# Altium PCB PCB1.PcbDoc
Units mm, origin at the board's own origin, x right, y up, seen from the top; angles counter-clockwise.
Board outline 51.41 x 51 mm, 2 copper layers (Top Layer, Bottom Layer); 51 components, 46 nets, 171 pads, 88 vias.
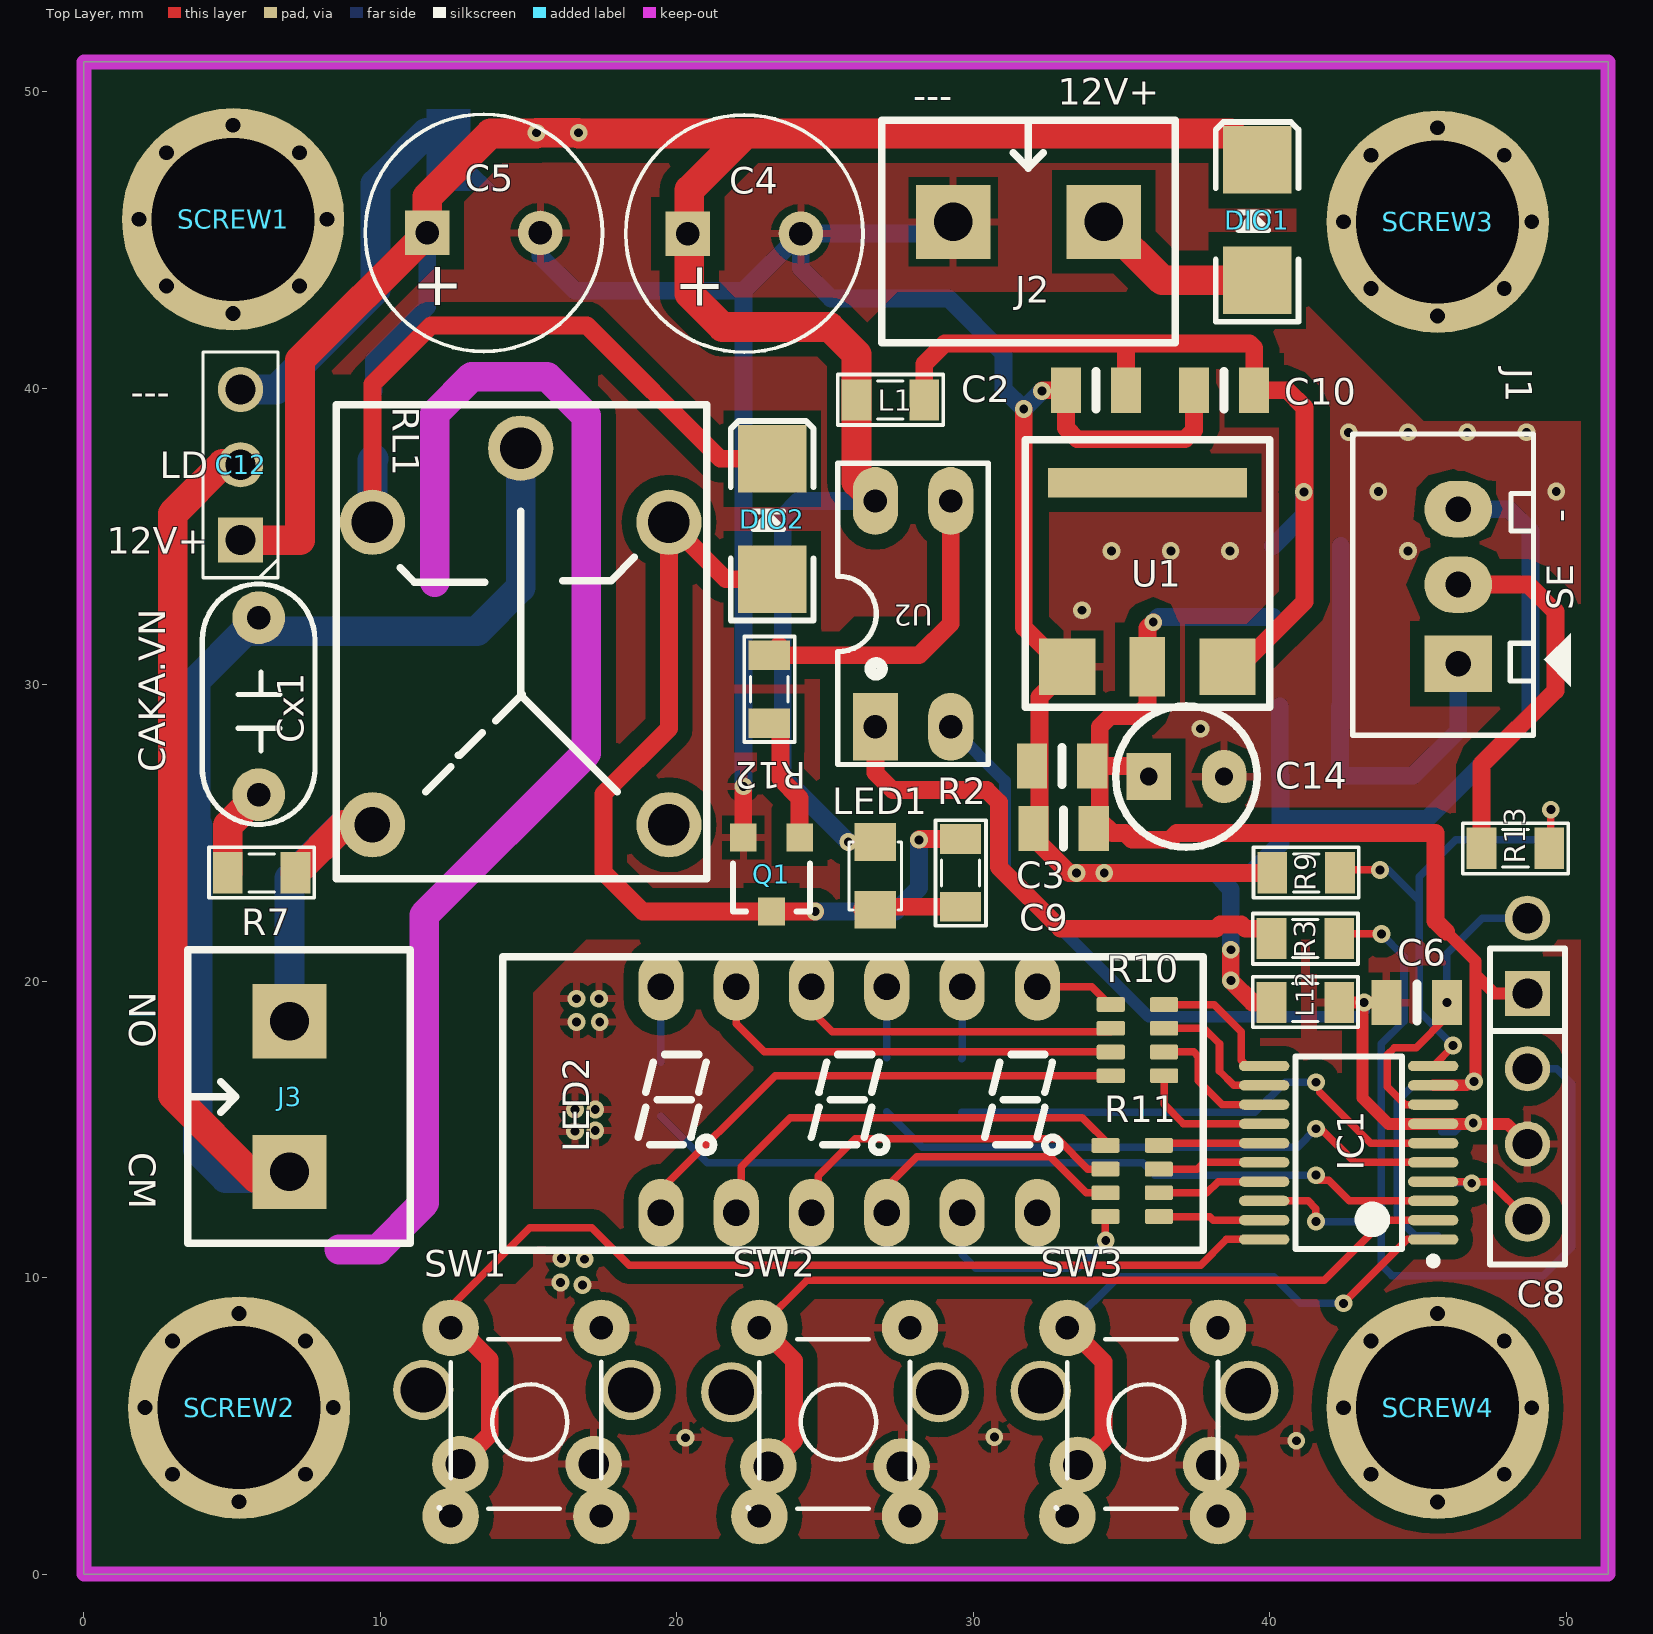
[diagram p0: Top Layer view]
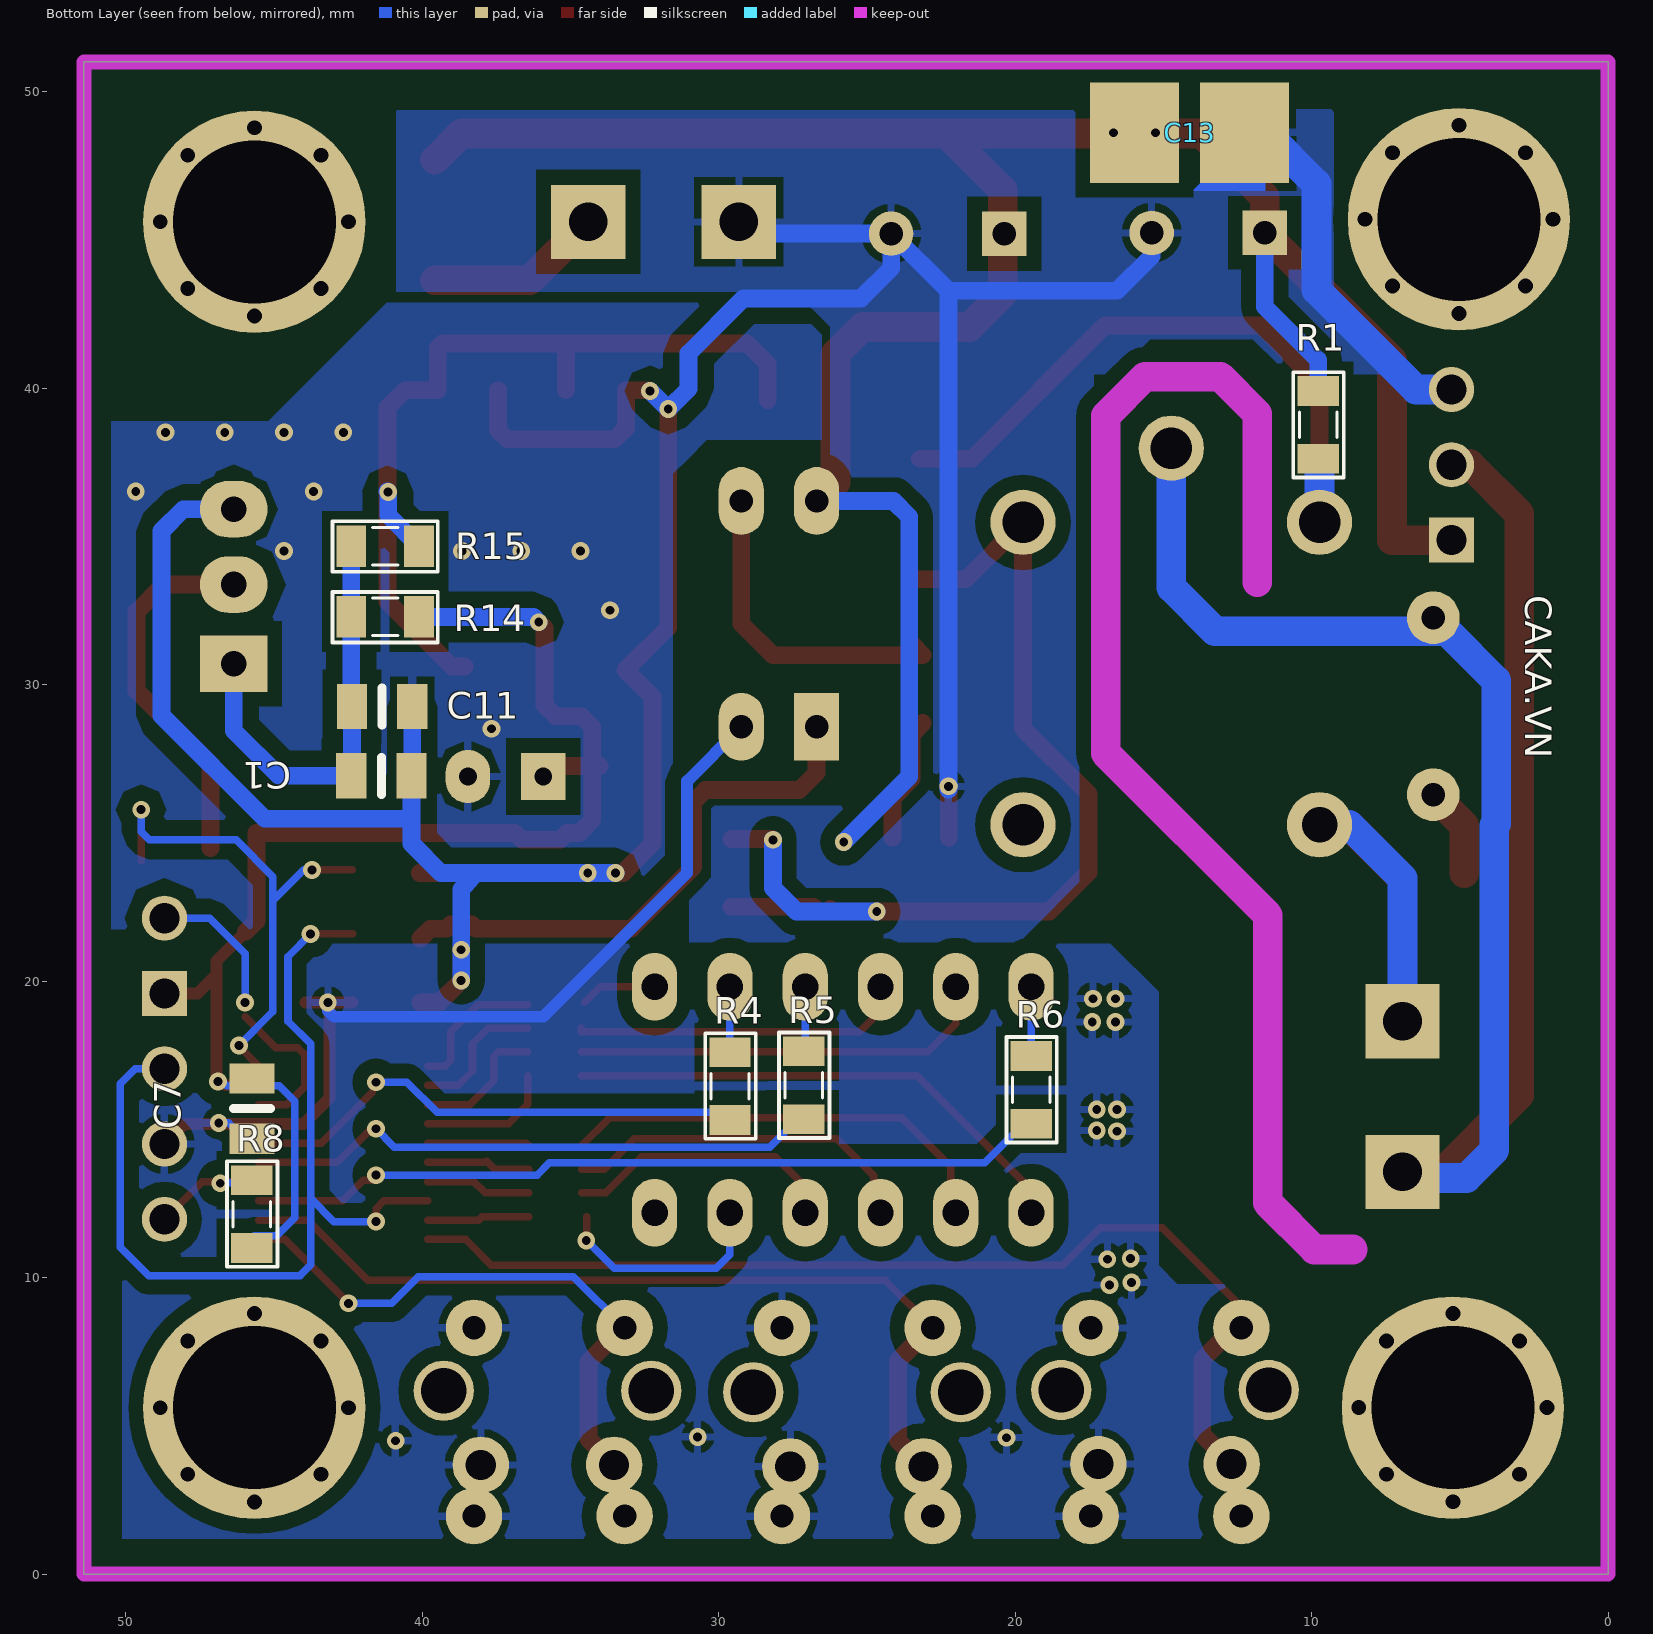
[diagram p1: Bottom Layer view, seen from below]
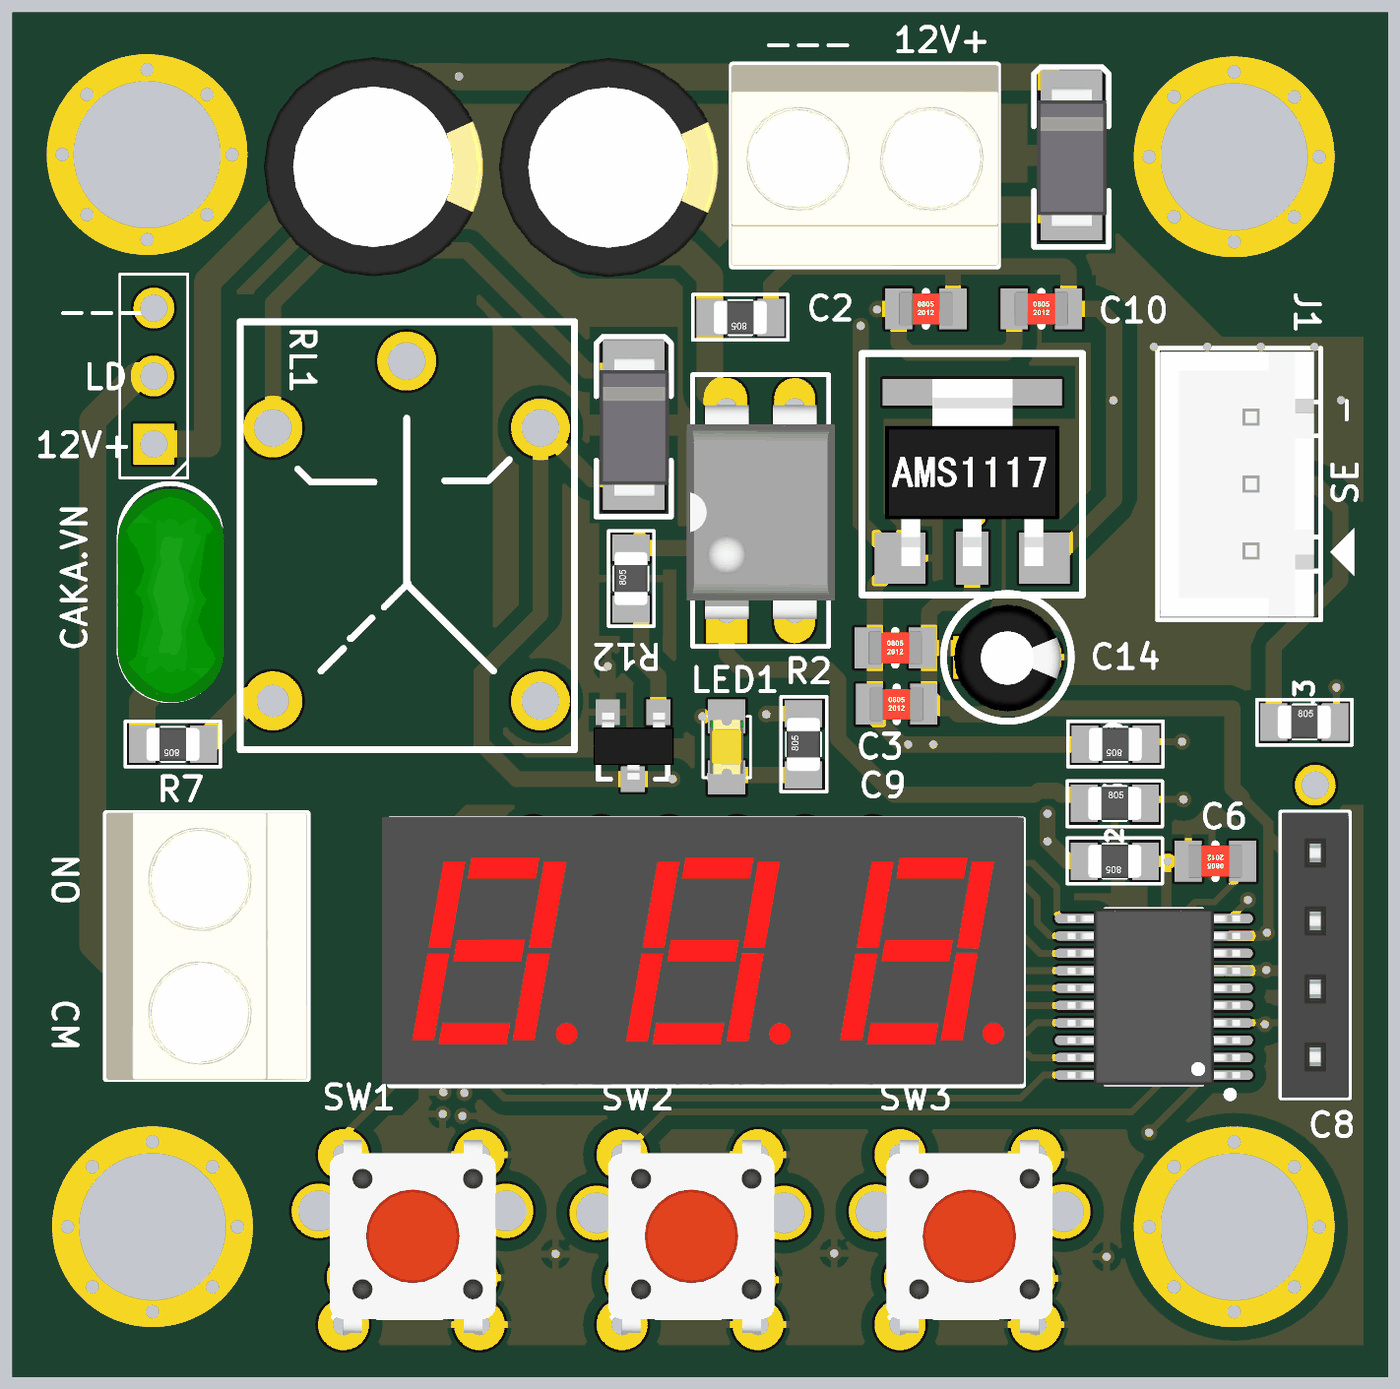
[diagram p2: 3D render of the assembled board from above, using the file's embedded part models]
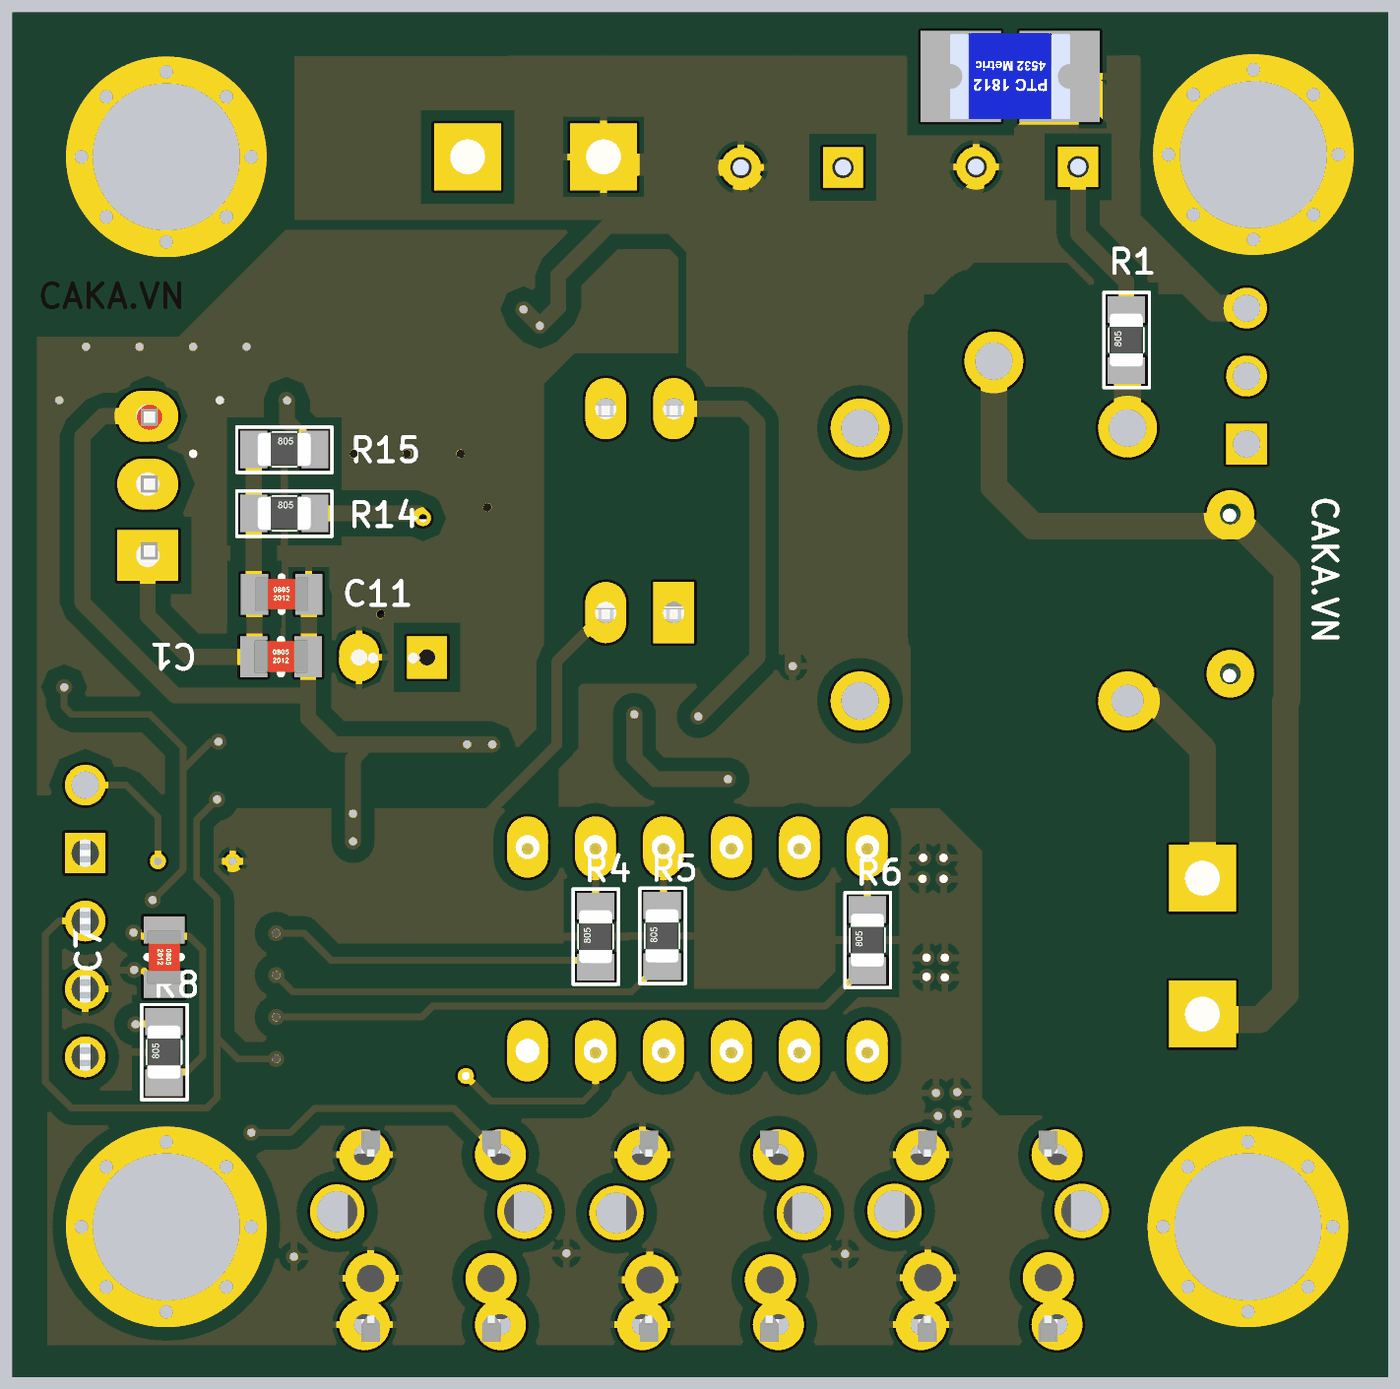
[diagram p3: 3D render of the assembled board from below, using the file's embedded part models]

## Layer stack, top to bottom
Top Solder: solder mask 0.0102, Solder Resist, Dk 3.5
Top Layer: signal copper 0.0356
Dielectric 1: dielectric 0.32, FR-4, Dk 4.8
Bottom Layer: signal copper 0.0356
Bottom Solder: solder mask 0.0102, Solder Resist, Dk 3.5

## Board outline
0,51.003 51.41,51.003 51.41,0 0,0

## Design rules (kind name [scope] priority, off if disabled: settings)
Clearance [All] p1: gap=0.254 except(0.5: Arc-THPad Arc-Poly Track-THPad Track-Poly SMDPad-THPad SMDPad-Poly THPad-Poly Via-Poly Fill-Poly Poly-Poly)
PolygonConnect PolygonConnect_1 [InNet('GND') And IsVia And IsStitchingVia] p1: connectstyle=Direct reliefconductorwidth=0.254 reliefentries=4 polygonreliefangle="90 Angle" airgapwidth=0.254
PolygonConnect [All] p2: connectstyle=Relief reliefconductorwidth=0.254 reliefentries=4 polygonreliefangle="90 Angle" airgapwidth=0.254
RoutingVias [All] p1: holewidth=0.3 width=0.6 viastyle="Through Hole" minholewidth=0.3 minwidth=0.6 maxholewidth=0.3 maxwidth=0.6
SolderMaskExpansion [All] p1: expansion=0.102
Width [All] p1: maxlimit=1 minlimit=0.254 preferedwidth=0.254
30 further rules are at their usual default settings.

## Components (designator, comment, footprint, x,y, rotation, side; value= is the part's Value field where it differs from the comment)
C1 "100nF" SMD-0805C 41.377,26.924 r270 bottom
C2 "100nF" SMD-0805C 34.138,39.929 r270 top
C3 "Value" SMD-0805C 32.995,27.254 r270 top
C4 "CN-ALU-DIP" CA-ALU-8 22.276,45.212 r0 top
C5 "CN-ALU-DIP" CA-ALU-8 13.487,45.237 r0 top
C6 "Value" SMD-0805C 44.958,19.279 r90 top
C7 "Value" SMD-0805C 45.745,15.697 r0 bottom
C8 "JP4" JP4-C1T 48.692,19.583 r270 top
C9 "Value" SMD-0805C 33.045,25.146 r270 top
C10 "100nF" SMD-0805C 38.456,39.929 r270 top
C11 "1uF" SMD-0805C 41.351,29.261 r270 bottom
C12 "JP3" JP3-CLOSED 5.283,34.874 r90 top
C13 "Value" "SMD-1812 FUSE" 12.268,48.616 r0 bottom
C14 "CN-ALU-DIP" CA-ALU-2.54 37.186,26.899 r0 top
Cx1 "XXpF" CN2.5 5.893,29.083 r90 top
DIO1 "Diode SMD" DIO-SMD-106 39.573,45.669 r270 top
DIO2 "Diode SMD" DIO-SMD-106 23.216,35.585 r270 top
IC1 "STM8S003F3P6" TSSOP20 42.66,14.21 r180 top locked
J1 "Header3" Header3 46.355,30.836 r90 top locked
J2 "KF2" KF2-5.08 31.86,45.61 r0 top
J3 "KF2" KF2-5.08 6.934,16.104 r90 top
L1 "100mH" RES-SMD-0805 27.203,39.599 r180 top
L12 "100uH" RES-SMD-0805 41.199,19.279 r180 top
LED1 "LED" LED-0805-Yellow 26.695,24.689 r270 top
LED2 "LED 7 SEG 0.28 3 DIGIT" "LED 7 Seg 0.28, 3 digit, RED" 19.46,12.19 r0 top locked
Q1 "2SC1815" SOT23-321 23.19,23.597 r180 top
R1 "0" RES-SMD-0805 9.779,38.76 r90 bottom
R2 "10k" RES-SMD-0805 29.566,23.647 r90 top
R3 "2k" RES-SMD-0805 41.199,21.438 r0 top
R4 "100" RES-SMD-0805 29.616,16.459 r90 bottom
R5 "100" RES-SMD-0805 27.127,16.485 r90 bottom
R6 "100" RES-SMD-0805 19.456,16.332 r90 bottom
R7 "Res" RES-SMD-0805 5.994,23.647 r180 top
R8 "10k" RES-SMD-0805 45.745,12.141 r90 bottom
R9 "Res" RES-SMD-0805 41.224,23.647 r180 top
R10 "RP330" RN4-0805 35.535,18.009 r180 top
R11 "RP330" RN4-0805 35.357,13.259 r180 top
R12 "2k" RES-SMD-0805 23.114,29.845 r90 top
R13 "Res" RES-SMD-0805 48.285,24.486 r0 top
R14 "Res" RES-SMD-0805 41.25,32.283 r180 bottom
R15 "Res" RES-SMD-0805 41.25,34.671 r180 bottom
RL1 "Relay TENGFEI" JQC-T78-DC12V-A 14.732,37.973 r270 top
SCREW1 "SCREW" SCREW-M5 5.029,45.695 r0 top
SCREW2 "SCREW" SCREW-M5 5.232,5.613 r0 top
SCREW3 "SCREW" SCREW-M5 45.66,45.61 r0 top
SCREW4 "SCREW" SCREW-M5 45.66,5.61 r0 top
SW1 "SW" SW2-DIP 17.45,8.306 r270 top
SW2 "SW" SW2-DIP 27.864,8.306 r270 top
SW3 "SW" SW2-DIP 38.252,8.306 r270 top
U1 "AMS1117-xx" SOT-233 33.172,30.607 r0 top
U2 "PC817" DIP4 26.695,28.575 r0 top

## Footprints (in the part's own frame and the unit in brackets; to place one, negate y for a bottom-side part, rotate by r counter-clockwise, add the part's x,y. Pads: shape width x height; smd on the part's side, far side on the other; paste and mask are expansions set on the pad)
CA-ALU-2.54 [mm]
  rect 1.5x1.58 hole 0.6: 1(-1.27,0)
  oval 1.5x1.8 hole 0.6: 2(1.27,0)
  silkscreen extent -2.39,-2.39 2.39,2.39, body extent -2,-2.03 1.99,1.97, height 7.01
CA-ALU-8 [mm] "Polarized capacitors, Aluminum Electrolytic Capacitors, 2-Leads, Body 8x16x3.5x0.5"
  rect 1.5x1.5 hole 0.8: 1(-1.905,0)
  round 1.5 hole 0.8: 2(1.905,0)
  silkscreen extent -4,-4 4,4, body extent -4.1,-4.1 4.1,4.1, height 14.4
CN2.5 [mil] "Tu pin to pin 250mil"
  round 70 hole 31: 1(-110,0) 2(125,0)
  silkscreen extent -150,-75 170,75, body extent -152,-80 162,77, height 539
DIO-SMD-106 [mil]
  rect 90x90.55 smd: 1(80,0) 2(-80,0)
  silkscreen extent -130,-55 135,55, body extent -99,-50 106,52, height 95
DIP4 [mil]
  rect 60x90 hole 31: 1(0,0)
  oval 60x90 hole 31: 2(100,0) 3(100,300) 4(0,300)
  silkscreen extent -50,-50 150,350, body extent -59,-10 159,305, height 170
Header3 [mil] "CON 3"
  rect 75x90 hole 34: 1(-5,0)
  oval 75x90 hole 34: 2(100,0) 3(200,0)
  silkscreen extent -100,-150 300,140, body extent -95,-90 295,136, height 276
JP3-CLOSED [mil]
  rect 60x60 hole 40: 1(0,0)
  round 60 hole 40: 2(100,0) 3(200,0)
  silkscreen extent -50,-50 250,50, body extent -52,-50 250,50, height 300
JP4-C1T [mm] "4 row, straight, gold plating"
  rect 1.52x1.52 hole 1.02: 1(0,0)
  round 1.52 hole 1.02: 2(2.54,0) 3(5.08,0) 4(7.62,0)
  silkscreen extent -1.52,-1.27 9.14,1.27, body extent -1.52,-1.25 9.14,1.25, height 8.51
JQC-T78-DC12V-A [mm]
  round 2.2 hole 1.4: 1(0,0) 2(2.5,5) 3(2.5,-5) 5(12.7,5)
  round 2.2 hole 1.2: 4(12.7,-5)
  silkscreen extent -1.47,-6.22 14.53,6.27, body extent -1.37,-6.1 14.35,6.17, height 14
KF2-5.08 [mm]
  rect 2.5x2.5 hole 1.3: 1(-2.54,0) 2(2.54,0)
  silkscreen extent -4.95,-4.08 4.95,3.43, body extent -5,-4.07 5,3.43, height 10
"LED 7 Seg 0.28, 3 digit, RED" [mil]
  oval 60x90 hole 35: 1(0,0) 2(100,0) 3(200,0) 4(300,0) 5(400,0) 6(500,0) 7(500,300) 8(400,300) 9(300,300) 10(200,300) 11(100,300) 12(0,300)
  silkscreen extent -210,-50 720,340, body extent -222,-50 722,344, height 229
LED-0805-Yellow [mil]
  rect 50x55 smd: 1(0,0) 2(90,0)
  silkscreen extent 0,-35 90,35, body extent 5,-25 85,25, height 43
RES-SMD-0805 [mil]
  rect 39.37x55 smd: 1(-45,0) 2(45,0)
  silkscreen extent -70,-34 70,33, body extent -39,-25 39,25, height 31
RN4-0805 [mm]
  round 0.254 on Mech15: 0(0,0)
  rrect25% 0.95x0.5 smd: 1(-0.9,1.2) 2(-0.9,0.4) 3(-0.9,-0.4) 4(-0.9,-1.2) 5(0.9,-1.2) 6(0.9,-0.4) 7(0.9,0.4) 8(0.9,1.2)
  Top Layer pour cut-out: -0.4,1.7 0.4,1.7 0.4,-1.7 -0.4,-1.7
  body extent -0.87,-1.68 0.88,1.67, height 0.7
SCREW-M5 [mm]
  round 7.5 hole 5.5 mask+0: 1(0,0)
SMD-0805C [mil]
  rect 60x40 smd: 1(0,40) 2(0,-40)
  silkscreen extent -25,0 25,0, body extent -25,-39 25,39, height 35
"SMD-1812 FUSE" [mm]
  rect 3x3.4 smd: 1(3.7,0) 2(0,0)
  body extent -0.4,-1.6 4.1,1.6, height 0.25
SOT23-321 [mm]
  rect 0.9x0.95 smd mask+0: 1(0.95,-1.25)
  rect 0.9x0.95 smd: 2(0,1.25) 3(-0.95,-1.25)
  silkscreen extent -1.3,-0.38 1.3,1.25, body extent -1.52,-1.23 1.48,1.27, height 1.06
SOT-233 [mm] "SOT-233"
  rect 1.9x1.9 smd: 1(0,0) 3(5.4,0)
  rect 1.2x2 smd: 2(2.7,0)
  rect 6.7x1 smd: 4(2.7,6.2)
  silkscreen extent -1.43,-1.38 6.83,7.65, body extent -0.55,-0.3 5.95,6.7, height 1.85
SW2-DIP [mil] "SW button 4pin, 250 x250 mil"
  round 75 hole 31: 1(0,0) 2(0,-200) 3(250,-200) 4(250,0)
  silkscreen extent 15,-215 240,0, body extent -36,-220 276,24, height 276
TSSOP20 [mm] "TSSOP, 20-Leads, Body 6.50x4.40mm, Pitch 0.65mm, IPC High Density"
  oval 1.7x0.35 smd: 1(-2.85,2.925) 2(-2.85,2.275) 3(-2.85,1.625) 4(-2.85,0.975) 5(-2.85,0.325) 6(-2.85,-0.325) 7(-2.85,-0.975) 8(-2.85,-1.625) 9(-2.85,-2.275) 10(-2.85,-2.925) 11(2.85,-2.925) 12(2.85,-2.275) 13(2.85,-1.625) 14(2.85,-0.975) 15(2.85,-0.325) 16(2.85,0.325) 17(2.85,0.975) 18(2.85,1.625) 19(2.85,2.275) 20(2.85,2.925)
  silkscreen extent -2.98,-3.25 1.8,3.77, body extent -3.23,-3.3 3.23,3.3, height 1.25

## Part data
C1 C2 C3 C6 C7 C9 C10 C11 C13: library part CAPACITOR, "CAP MLCC SMT"
C4 C5 C14: "Capacitor (Semiconductor SIM Model)"
C8 C12: "WR-PHD 2.54 mm Angled Socket Header"
Cx1: library part CN
DIO1 DIO2: "Default Diode"
IC1: "MCU 8BIT  8KB FLASH TSSOP-20"
J1: "Header IDC, 3 x 1 Pin Vertical 2.54mm Pitch (Non-Boxed, Male)"
L1 L12 R1 R2 R3 R4 R5 R6 R7 R8 R9 R12 R13 R14 R15: library part Res-SMD, "Resistor"
LED1: library part "LED SMD"
LED2: library part "LED 7 Segment"
Q1: "NPN 600mW, ECB"
R10 R11: library part RN4-Dual
SW1 SW2 SW3: library part SW4, "Switch button 4 pin"
U2: "Single Opto"

## Free pads (board coordinates)
  round 1.52 hole 1.02: 0(48.692,22.123)
  round 1.905 hole 1.016: 1(12.696,3.708) 1(23.084,3.632) 1(33.524,3.683) 2(17.196,3.708) 2(27.584,3.632) 2(38.024,3.683)
  round 2.032 hole 1.524: ""(11.446,6.208) ""(18.446,6.208) ""(21.834,6.132) ""(28.834,6.132) ""(32.274,6.183) ""(39.274,6.183)

## Via types
v1: diameter 0.6, hole 0.3, Top Layer to Bottom Layer, tented both sides, 50 vias
v2: diameter 0.5, hole 0.5, Top Layer to Bottom Layer, 32 vias
v3: diameter 0.6, hole 0.3, Top Layer to Bottom Layer, 4 vias
v4: diameter 0.6, hole 0.3, Top Layer to Bottom Layer, tented top, 2 vias

## Nets (pads, with @x,y where several pads share a name; then routed paths per layer and width w, separated by ;. In a path a pad name is that pad's centre, name@x,y a point inside that pad or via, vN(x,y) a via of type N, cw(c..) or ccw(c..) an arc to the next point about the centre after c; other vN are vias at no path point)
12V: C2.1 C10.1 L1.1 R15.2 U1.3 | length 30
  Top Layer w0.6: L1.1 28.346,40.818 29.032,41.504 35.154,41.504 ; C2.1 35.154,41.504 ; U1.3 38.989,30.607 41.173,32.791 41.173,39.345 40.589,39.929 C10.1 39.472,41.351 39.319,41.504 35.154,41.504
  Bottom Layer w0.6: R15.2 41.148,35.712 v1(41.148,36.5) v1@41.173,36.525
A_7: IC1.13 R10.2 | length 4.6
  Top Layer w0.254: R10.2 37.433,17.609 37.592,17.45 37.592,16.637 38.394,15.835 IC1.13
B_7: IC1.12 R10.3 | length 4.7
  Top Layer w0.254: R10.3 37.776,18.409 38.303,17.882 38.303,16.967 38.786,16.485 IC1.12
BT1: IC1.20 pad.1@12.696,3.708 SW1.2 SW1.3 | length 35.4
  Top Layer w0.254: SW1.2@12.37,8.56 12.37,9.017 15.037,11.684 17.131,11.684 18.395,10.42 37.674,10.42 38.539,11.285 IC1.20
  Top Layer w0.6: SW1.2@12.548,8.382 13.691,7.239 13.691,4.703 pad.1@12.696,3.708
BT2: IC1.2 pad.1@23.084,3.632 SW2.2 SW2.3 | length 29.8
  Top Layer w0.254: SW2.2 22.816,8.338 24.39,9.912 41.839,9.912 43.862,11.935 IC1.2
  Top Layer w0.6: SW2.2@22.816,8.338 23.952,7.201 23.952,4.5 pad.1@23.084,3.632
BT3: IC1.1 pad.1@33.524,3.683 SW3.2 SW3.3 | length 19.9
  Top Layer w0.254: v1(42.481,9.131) 44.635,11.285 IC1.1
  Top Layer w0.6: SW3.2@33.172,8.382 34.392,7.163 34.392,4.551 pad.1@33.524,3.683
  Bottom Layer w0.254: SW3.2 34.9,10.033 40.132,10.033 41.034,9.131 v1(42.481,9.131)
C_7: IC1.17 R11.2 | length 3.6
  Top Layer w0.254: R11.2@36.409,12.859 37.878,12.859 38.254,13.235 IC1.17
D_7: IC1.15 R11.4 | length 3.4
  Top Layer w0.254: R11.4@36.409,14.459 36.485,14.535 IC1.15
DIG1: IC1.3 R6.1 | length 27.1
  Top Layer w0.254: v1@41.656,13.284 41.986,13.284 42.686,12.585 IC1.3
  Bottom Layer w0.254: R6.1@19.456,15.443 21.031,13.868 35.712,13.868 36.127,13.454 v1(41.554,13.454)
DIG2: IC1.5 R5.1 | length 19.4
  Top Layer w0.254: v1@41.758,14.986 42.859,13.885 IC1.5
  Bottom Layer w0.254: R5.1@27.076,15.596 28.27,14.402 40.936,14.402 v1(41.554,15.02)
DIG3: IC1.6 R4.1 | length 16.9
  Top Layer w0.254: 41.681,16.256 43.403,14.535 IC1.6
  Bottom Layer w0.254: R4.1@29.616,15.57 39.497,15.57 40.513,16.586 v1(41.554,16.586)
DP: IC1.16 R11.3 | length 3.5
  Top Layer w0.254: R11.3@36.409,13.659 37.56,13.659 37.821,13.919 37.855,13.885 IC1.16
E_7: IC1.14 R10.1 | length 4.6
  Top Layer w0.254: R10.1 36.435,15.839 37.089,15.185 IC1.14
F_7: IC1.11 R10.4 | length 4.8
  Top Layer w0.254: R10.4 38.119,19.209 39.04,18.288 39.04,17.323 39.228,17.135 IC1.11
G_7: IC1.19 R11.1 | length 3.5
  Top Layer w0.254: R11.1@36.409,12.059 37.967,12.059 38.091,11.935 IC1.19
GND: C1.1 C2.2 C3.2 C4.2 C5.2 C9.2 C10.2 C11.1 C12.3 C13.2 C14.2 J1.3 J2.1 L12.2 Q1.1 R9.2 U1.1 | length 129.5
  Top Layer w0.6: Q1.1 22.24,26.558 v1(22.25,26.568) ; v1(31.699,39.294) 31.699,31.931 33.14,30.49 32.233,29.582 32.233,27.711 32.233,24.638 33.223,23.647 v1(33.477,23.647) v1(34.417,23.647) R9.2 ; v1(32.311,39.906) 32.334,39.929 C2.2 33.122,38.659 33.503,38.278 37.135,38.278 37.44,38.583 C10.2 ; v1(38.684,21.057) v1(38.684,20.015) 39.421,19.279 L12.2
  Bottom Layer w0.6: C5.2 15.392,44.45 16.561,43.282 22.25,43.282 ; v1@22.25,26.467 v1(22.25,26.568) 22.25,43.282 ; J2.1 28.923,45.212 C4.2 ; v1(32.311,39.906) v1(31.699,39.294) 31.013,39.98 31.013,41.173 29.159,43.028 25.197,43.028 24.181,44.044 C4.2 ; v1(33.477,23.647) v1(34.417,23.647) 38.202,23.647 ; v1(38.684,20.015) v1(38.684,21.057) 38.684,23.089 38.202,23.647 ; C11.1 40.335,26.949 C1.1 40.361,25.476 ; J1.3@46.355,36.563 J1.3 48.057,35.916 48.793,35.179 48.793,28.956 45.314,25.476 40.361,25.476 ; 22.25,43.282 C4.2 ; 38.202,23.647 39.37,23.647 40.361,24.638 40.361,25.476
  Bottom Layer w1: C12.3 6.477,39.954 9.832,43.31 9.832,46.891 11.557,48.616 C13.2
  other v1: 37.66,28.51 33.66,32.51 34.66,34.51 36.66,34.51 38.66,34.51 44.66,34.51 43.66,36.51 49.66,36.51 42.66,38.51 44.66,38.51 46.66,38.51 48.66,38.51
"GND MCU": C6.1 C7.1 C8.3 IC1.7 L12.1 pad.2 SW1.1 SW1.4 SW2.1 SW2.4 SW3.1 SW3.4 U2.2 | length 32.4
  Top Layer w0.4: L12.1 v3@43.129,19.279 ; C6.1 v3@43.129,19.279 ; C8.3 48.011,15.185 IC1.7 43.997,15.185 43.129,16.053 v3@43.129,19.279
  Bottom Layer w0.254: C7.1@45.796,14.922 46.24,14.922 46.533,15.215 v1(46.863,15.215)
  Bottom Layer w0.4: U2.2 31.064,26.746 31.064,23.647 35.916,18.796 42.98,18.796 43.183,18.999 v3(43.183,19.275) v3@43.155,19.304
  other v1: 40.894,4.496 20.295,4.597 30.709,4.623 16.815,9.754 16.078,9.83 16.891,10.617 16.104,10.643 16.561,14.935 17.247,14.961 16.561,15.672 17.247,15.672 16.612,18.618 17.399,18.618 16.612,19.406 17.374,19.406
"MCU RESET": C8.4 IC1.4 R8.2 | length 4.9
  Top Layer w0.254: IC1.4 47.421,13.235 C8.4
  Bottom Layer w0.254: R8.2@45.695,13.195 46.901,13.195 v1@46.914,13.183
  other v1: 46.812,13.183
NetC1_2: C1.2 C11.2 J1.1 R14.1 R15.1 | length 15.3
  Bottom Layer w0.6: C11.2 42.367,26.949 C1.2 44.831,26.924 46.355,28.448 J1.1 ; C11.2@42.393,28.55 R14.1 R15.1
NetC6_2: C6.2 IC1.8 pad.0 | length 10.3
  Top Layer w0.254: IC1.8 44.567,15.835 43.96,16.441 43.96,17.51 44.205,17.755 44.933,17.755 C6.2@45.974,18.796
  Bottom Layer w0.254: v3(45.974,19.279) 45.974,20.93 47.168,22.123 pad.0
NetC12_2: C12.2 Cx1.2 J3.1 RL1.1 | length 63.4
  Top Layer w1: C12.2@4.674,37.44 2.997,35.763 2.997,16.154 5.791,13.36 J3.1@6.934,13.36
  Bottom Layer w1: J3.1@6.934,13.36 4.775,13.36 3.835,14.3 3.835,25.248 3.775,25.308 3.775,30.14 5.436,31.801 13.259,31.801 14.732,33.274 RL1.1
NetCx1_1: Cx1.1 R7.2 | length 3.1
  Top Layer w1: R7.2 4.851,25.248 Cx1.1
NetDIO2_1: DIO2.1 Q1.2 R2.2 RL1.2 | length 31.5
  Top Layer w0.6: DIO2.1 21.652,33.553 RL1.2 19.732,28.52 17.526,26.314 17.526,23.673 18.852,22.347 Q1.2 v1(24.669,22.347) ; v1(28.169,24.765) 28.194,24.79 R2.2
  Bottom Layer w0.6: v1(24.669,22.347) 27.376,22.347 28.169,23.139 v1(28.169,24.765)
NetDIO2_2: DIO2.2 R1.1 RL1.3 | length 23
  Top Layer w0.6: RL1.3 9.732,40.136 11.709,42.113 16.967,42.113 21.463,37.617 DIO2.2
  Bottom Layer w1: RL1.3 9.732,37.57 R1.1
NetJ1_2: J1.2 R13.1 | length 12.7
  Top Layer w0.6: J1.2 48.717,33.376 49.632,32.461 49.632,29.794 47.142,27.305 R13.1
NetJ3_2: J3.2 R7.1 RL1.4 | length 11.8
  Top Layer w1: R7.1 8.763,25.273 RL1.4
  Bottom Layer w1: J3.2@6.934,18.44 J3.2 6.934,23.47 8.738,25.273 RL1.4
NetLED1_2: LED1.2 R2.1 | length 2.9
  Top Layer w0.6: LED1.2@26.238,22.428 LED1.2@26.264,22.403 ; LED1.2 26.797,22.504 R2.1
NetLED2_1: LED2.1 R10.8 | length 17.5
  Top Layer w0.254: LED2.1 19.46,12.958 23.311,16.809 R10.8
NetLED2_2: LED2.2 R11.5 | length 15.1
  Top Layer w0.254: LED2.2 22.174,12.363 22.174,13.741 23.825,15.392 33.676,15.392 R11.5@34.609,14.459
NetLED2_3: LED2.3 R11.6 | length 12.1
  Top Layer w0.254: LED2.3 24.765,12.414 24.765,13.437 26.01,14.681 32.842,14.681 33.865,13.659 R11.6@34.609,13.659
NetLED2_4: LED2.4 R11.7 | length 9.3
  Top Layer w0.254: LED2.4 27.08,13.06 28.092,14.072 32.588,14.072 33.801,12.859 R11.7@34.609,12.859
NetLED2_5: LED2.5 R11.8 | length 8.2
  Top Layer w0.254: LED2.5@29.62,11.629 LED2.5 ; R11.8 34.457,11.263 v3(34.468,11.252)
  Bottom Layer w0.254: LED2.5 29.62,10.766 30.074,10.312 33.528,10.312 v3(34.468,11.252)
NetLED2_7: LED2.7 R10.5 | length 2.6
  Top Layer w0.254: LED2.7 33.988,19.81 R10.5@34.519,19.279
NetLED2_8: LED2.8 R4.2 | length 2.5
  Bottom Layer w0.254: R4.2@29.617,17.386 29.62,17.39 LED2.8 LED2.8@29.62,19.923
NetLED2_9: LED2.9 R5.2 | length 2.8
  Bottom Layer w0.254: R5.2@27.077,17.411 27.08,17.415 LED2.9 LED2.9@27.08,20.19
NetLED2_10: LED2.10 R10.6 | length 11.3
  Top Layer w0.254: LED2.10 24.54,18.995 25.248,18.288 26.605,18.288 26.607,18.286 34.635,18.286 R10.6
NetLED2_11: LED2.11 R10.7 | length 14.3
  Top Layer w0.254: LED2.11 22,18.563 22.955,17.609 R10.7
NetLED2_12: LED2.12 R6.2 | length 2.6
  Bottom Layer w0.254: R6.2@19.457,17.259 19.46,17.263 LED2.12
NetQ1_3: Q1.3 R12.1 | length 4.3
  Top Layer w0.6: R12.1 23.495,28.321 23.495,26.822 24.14,26.178 24.14,26.037 ; Q1.3 24.14,26.036
NetR3_1: R3.1 U2.1 | length 18.6
  Top Layer w0.6: U2.1 26.695,27.026 27.28,26.441 30.455,26.441 30.861,26.035 30.861,23.851 32.944,21.768 38.188,21.768 38.33,21.911 39.038,21.911 39.181,21.768 39.726,21.768 R3.1
NetR12_2: R12.2 U2.3 | length 11.2
  Top Layer w0.6: R12.2@23.444,31.318 R12.2 28.169,30.988 29.235,32.055 U2.3
SWIM: C8.2 IC1.18 R3.2 | length 32.7
  Top Layer w0.254: IC1.18 41.289,12.585 41.554,12.319 v1(41.554,11.887) ; R3.2@42.342,21.59 v1(43.764,21.59)
  Bottom Layer w0.254: v1(41.554,11.887) 42.977,11.887 43.764,12.675 ; v1(43.764,21.59) 44.526,20.828 44.526,18.644 43.764,17.882 43.764,12.675 ; C8.2@48.283,17.043 C8.2 49.682,17.043 50.19,16.535 50.19,11.024 49.225,10.058 44.12,10.058 44.12,10.084 43.764,10.439 43.764,12.675
TRIGGER: IC1.10 R9.1 R13.2 | length 17.8
  Top Layer w0.254: R9.1@42.367,23.749 v1(43.713,23.749) ; IC1.10 46.203,17.827 46.199,17.831 v1(46.177,17.831) ; R13.2@49.479,24.054 v1(49.479,25.781)
  Bottom Layer w0.254: v1(43.713,23.749) 43.993,23.749 45.034,22.708 ; v1(46.177,17.831) 45.034,18.974 45.034,22.708 ; v1(49.479,25.781) 49.479,25.044 49.2,24.765 46.279,24.765 45.034,23.52 45.034,22.708
VCC: C3.1 C7.2 C8.1 C9.1 C14.1 IC1.9 R8.1 R14.2 U1.2 | length 45.8
  Top Layer w0.4: IC1.9 v1@46.634,16.485 ; 45.949,21.666 46.939,20.676 46.939,20.218 ; v1@46.838,16.688 46.939,16.789 46.939,20.218 ; C8.1 47.574,19.583 46.939,20.218
  Top Layer w0.6: C3.1 C3.1@34.265,27.254 ; C14.1@35.56,27.254 C3.1@34.265,27.254 ; v3(36.068,32.106) 35.872,31.91 U1.2 35.872,29.304 35.499,28.931 34.62,28.931 34.265,28.575 C3.1@34.265,27.254 ; 45.949,21.666 45.593,22.022 45.593,24.994 36.861,24.994 36.634,24.767 35.35,24.767 35.123,24.994 34.696,24.994 34.265,25.425 C3.1@34.265,27.254
  Bottom Layer w0.254: R8.1@45.695,11.379 45.669,11.405 44.907,11.405 44.298,12.014 44.298,15.951 44.819,16.472 46.597,16.472 46.736,16.612 v1(46.888,16.612)
  Bottom Layer w0.6: v3(36.068,32.106) 36.246,32.283 R14.2
"VCC RL": C4.1 C5.1 C12.1 C13.1 DIO1.2 L1.2 LED1.1 R1.2 U2.4 | length 83.8
  Top Layer w1: C12.1 7.29,34.874 7.29,40.945 C5.1 11.582,46.457 13.716,48.59 v4@15.265,48.59 ; v4(15.265,48.616) v4@16.662,48.616 ; v4@16.688,48.59 18.11,48.59 ; 18.161,48.59 18.11,48.59 ; U2.4 26.06,36.83 L1.2 26.06,41.148 25.146,42.062 21.539,42.062 20.422,43.18 20.422,46.685 22.327,48.59 ; DIO1.2 38.684,48.59 22.327,48.59 ; 18.11,48.59 22.327,48.59
  Bottom Layer w0.6: R1.2 9.779,40.945 11.582,42.748 C5.1 ; v1(25.781,24.689) 23.571,26.899 23.571,35.662 24.105,36.195 U2.4
  other v4: 16.688,48.616
VIN: DIO1.1 J2.2 | length 6
  Top Layer w1: J2.2 36.373,43.637 DIO1.1
pads on no net: LED2.6 R10.0 R11.0 RL1.5 SCREW1.1 SCREW2.1 SCREW3.1 SCREW4.1 U1.4
copper on no net:
  other v2: 5.232,2.438 45.66,2.435 2.987,3.368 7.477,3.368 43.415,3.365 47.905,3.365 2.057,5.613 8.407,5.613 42.485,5.61 48.835,5.61 2.987,7.858 7.477,7.858 43.415,7.855 47.905,7.855 5.232,8.788 45.66,8.785 45.66,42.435 5.029,42.52 43.415,43.365 47.905,43.365 2.784,43.45 7.274,43.45 42.485,45.61 48.835,45.61 1.854,45.695 8.204,45.695 43.415,47.855 47.905,47.855 2.784,47.94 7.274,47.94 45.66,48.785 5.029,48.87

## Polygon pours and split planes (outlines as drawn)
"GND MCU" on Bottom Layer "GND_MCU_L02_P000" (solid, remove dead copper, pour order 0): 16.789,21.26 15.164,19.634 15.164,10.414 15.011,10.262 14.529,9.779 11.125,9.779 10.058,8.712 9.957,8.611 9.957,2.388 9.957,1.168 9.982,1.194 25.679,1.194 50.114,1.194 50.114,21.26
GND on Bottom Layer "GND_L02_P004" (solid, remove dead copper, pour order 4): 50.495,21.742 50.495,38.887 45.187,38.887 41.834,42.24 41.199,42.875 27.584,42.875 26.518,41.808 26.518,40.513 26.518,38.252 30.328,38.252 30.404,38.252 31.064,37.592 31.547,37.109 31.547,26.924 31.547,24.511 34.341,21.717
GND on Bottom Layer "GND_L02_P010" (solid, remove dead copper, pour order 10): 9.246,49.403 9.246,44.475 9.246,43.256 9.22,43.256 7.493,41.529 7.493,35.966 7.493,30.226 9.83,30.226 10.414,30.226 11.074,30.886 11.074,40.767 11.1,40.767 11.989,41.656 15.443,41.656 15.926,41.173 17.831,39.268 17.831,36.144 17.831,23.343 19.456,21.717 19.863,21.311 30.988,21.311 30.988,22.758 30.328,23.419 30.251,23.495 30.251,25.806 30.15,25.908 25.908,25.908 25.679,25.908 24.943,26.645 24.79,26.797 24.79,31.115 24.79,31.14 25.806,32.156 25.959,32.309 29.413,32.309 29.845,32.309 30.836,33.299 30.886,33.35 30.886,36.525 30.886,36.551 29.82,37.617 29.667,37.77 26.264,37.77 26.238,37.744 26.238,41.3 26.238,42.062 27.432,43.256 40.869,43.256 40.869,49.352 40.843,49.378
"GND MCU" on Top Layer "GND_MCU_L01_P002" (solid, remove dead copper, pour order 2): 16.942,21.387 15.164,19.609 15.164,10.389 15.037,10.262 14.554,9.779 11.151,9.779 10.084,8.712 9.982,8.611 9.982,2.388 9.982,1.168 10.008,1.194 25.705,1.194 50.495,1.194 50.495,21.387
GND on Top Layer "GND_L01_P006" (solid, remove dead copper, pour order 6): 50.495,21.742 50.495,38.887 45.187,38.887 41.834,42.24 41.199,42.875 27.584,42.875 26.518,41.808 26.518,40.513 26.518,38.252 30.328,38.252 30.404,38.252 31.064,37.592 31.547,37.109 31.547,26.924 31.547,24.511 34.341,21.717
GND on Top Layer "GND_L01_P008" (solid, remove dead copper, pour order 8): 9.271,49.403 9.271,44.475 9.271,43.256 9.246,43.256 7.518,41.529 7.518,35.966 7.518,30.226 9.855,30.226 10.439,30.226 11.1,30.886 11.1,40.767 11.125,40.767 12.014,41.656 15.469,41.656 15.951,41.173 17.856,39.268 17.856,36.144 17.856,23.343 19.482,21.717 19.888,21.311 31.013,21.311 31.013,22.758 30.353,23.419 30.277,23.495 30.277,25.806 30.175,25.908 25.933,25.908 25.705,25.908 24.968,26.645 24.816,26.797 24.816,31.115 24.816,31.14 25.832,32.156 25.984,32.309 29.439,32.309 29.87,32.309 30.861,33.299 30.912,33.35 30.912,36.525 30.912,36.551 29.845,37.617 29.693,37.77 26.289,37.77 26.264,37.744 26.264,41.3 26.264,42.062 27.457,43.256 40.894,43.256 40.894,49.352 40.869,49.378

## Keep-outs
Keep-Out Layer:
  lines w0.5: 0,0 0,51.003 51.41,51.003 51.41,0 0,0
  lines w1: 8.611,10.947 9.906,10.947 11.481,12.522 11.481,22.225 16.942,27.686 16.942,39.065 15.621,40.386 13.081,40.386 11.836,39.141 11.836,33.452

## Other copper
Top Layer:
  pour cut-out: 1.245,36.236 1.245,40.462 8.992,40.462 10.592,40.462 17.348,40.462 17.348,24.841 15.926,23.673 12.294,20.955 12.294,16.967 12.294,12.004 10.709,10.302 10.592,10.302 1.245,10.302
  pour cut-out: 44.831,35.56 44.939,36.646 45.352,37.059 46.203,37.287 46.901,36.932 47.638,36.861 47.638,36.195 47.638,35.458 47.003,34.823 45.418,34.641 45.352,35.255
Bottom Layer:
  region net GND: 11.557,49.403 13.03,49.403 13.03,47.625 13.968,46.687 13.968,46.662 11.557,46.662
  pour cut-out: 1.245,36.236 1.245,40.462 8.992,40.462 10.592,40.462 17.348,40.462 17.348,24.841 15.926,23.673 12.294,20.955 12.294,16.967 12.294,12.004 10.709,10.302 10.592,10.302 1.245,10.302
  pour cut-out: 45.187,35.636 45.187,36.373 45.72,36.906 46.914,36.906 47.65,36.17 47.65,35.433 47.015,34.798 45.796,34.798 45.364,35.23

## Silkscreen, mask and mechanical layers (free items; w line width, h text height)
Top Overlay:
  text "12V+" at 32.842,49.555 h0.9
  text "---" at 27.965,49.428 h0.9
  text "---" at 1.575,39.421 h0.9
  text "LD" at 2.565,36.957 h0.9
  text "-" at 50.216,35.484 h0.9 r90
  text "12V+" at 0.762,34.417 h0.9
  text "SE" at 50.241,32.512 h0.9 r90
  text "CAKA.VN" at 2.743,27.051 h0.9 r90
  text "NO" at 1.524,19.634 h0.9 r270
  text "CM" at 1.524,14.224 h0.9 r270
Bottom Overlay:
  text "CAKA.VN" at 2.794,33.02 h0.9 r90
Bottom Solder:
  text "CAKA.VN" at 50.546,39.98 h0.9

## Text inside footprints (layer, text, board x,y; h text height)
C4: Top Overlay "+" at 19.904,42.771 h1.5
C5: Top Overlay "+" at 11.074,42.799 h1.5